# EAGLE board board_schematic (EAGLE 7.7.0)
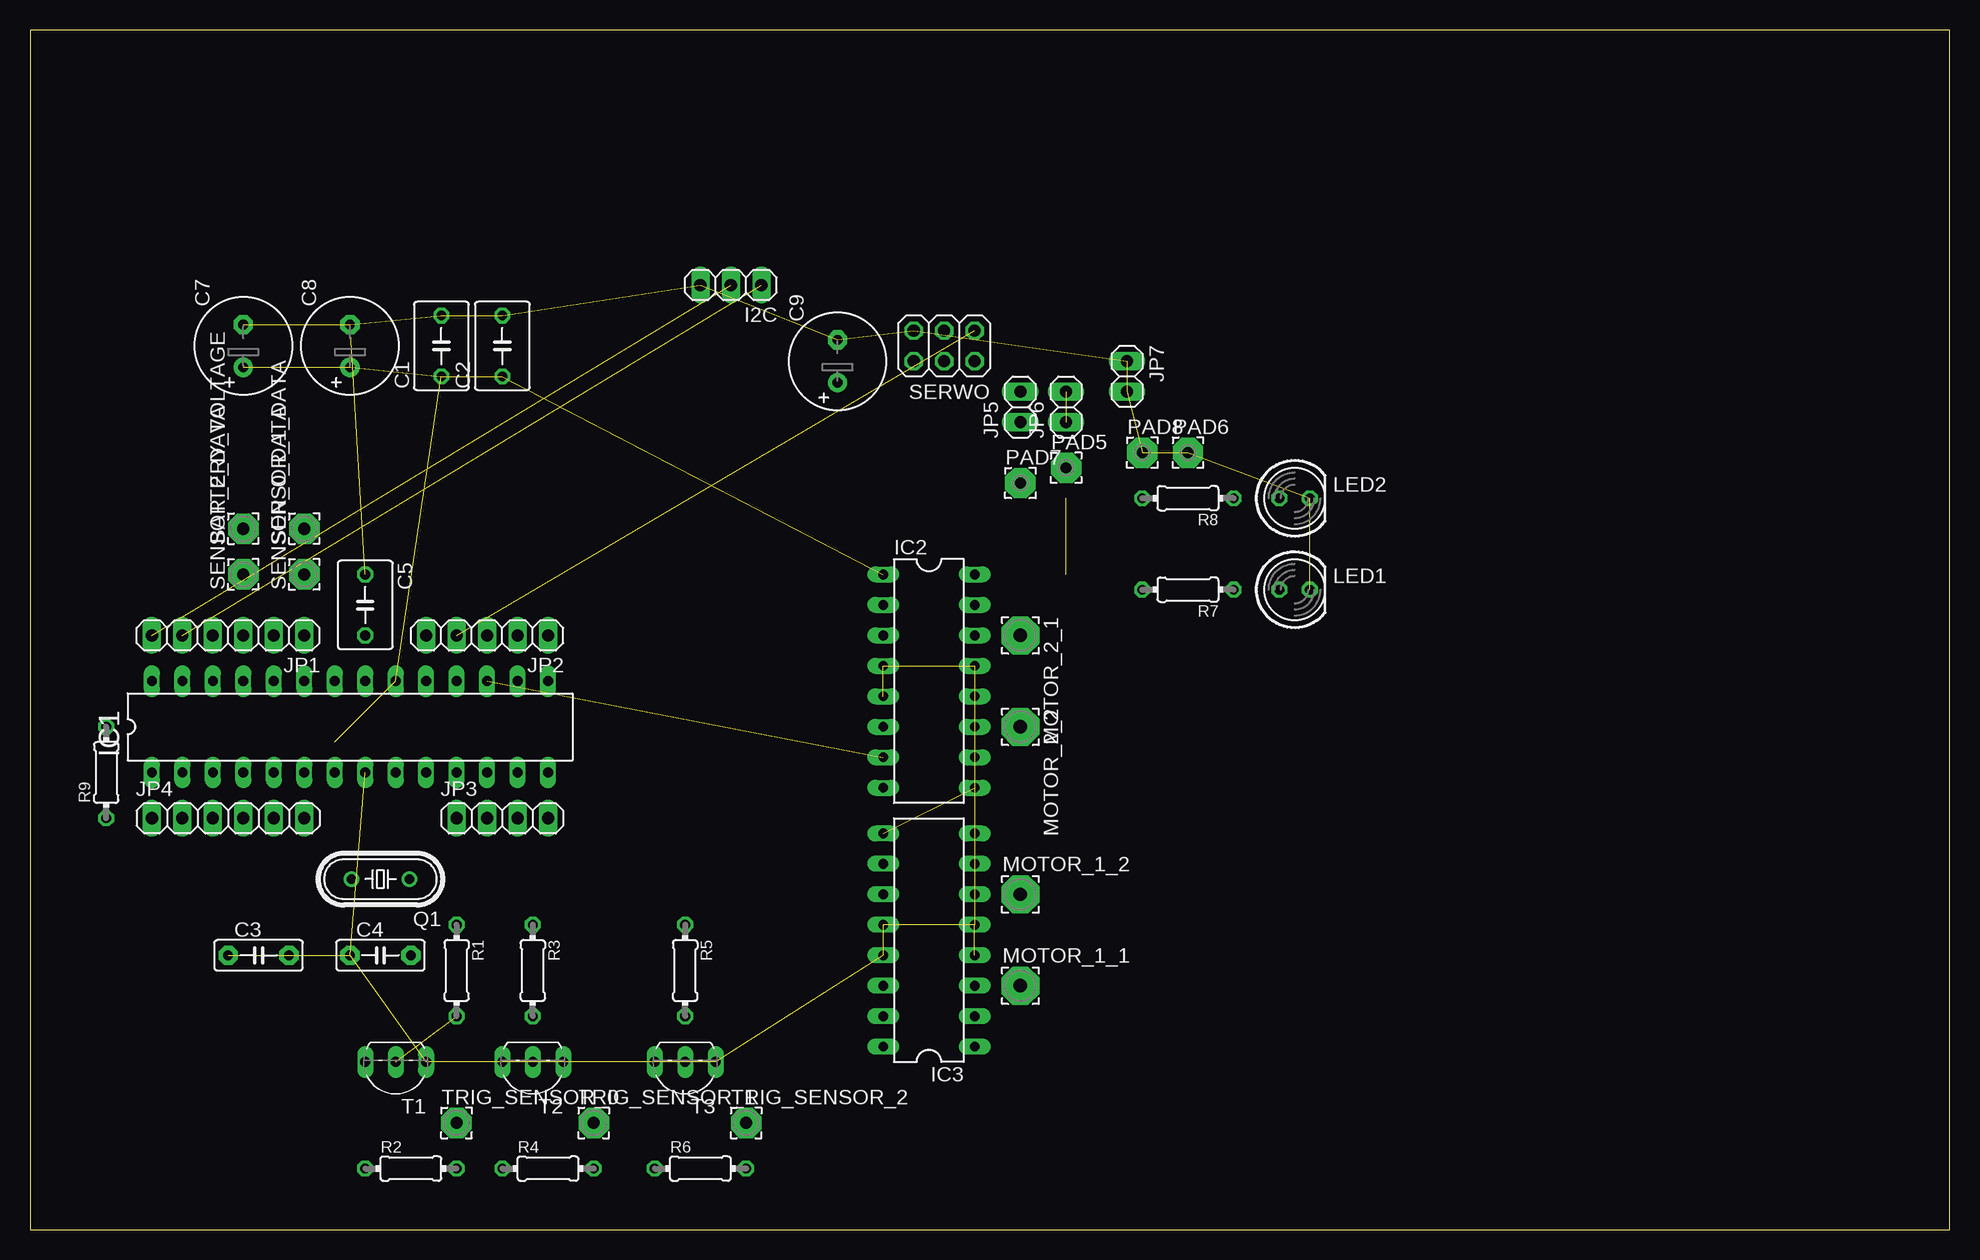
[diagram p0: board, top side]
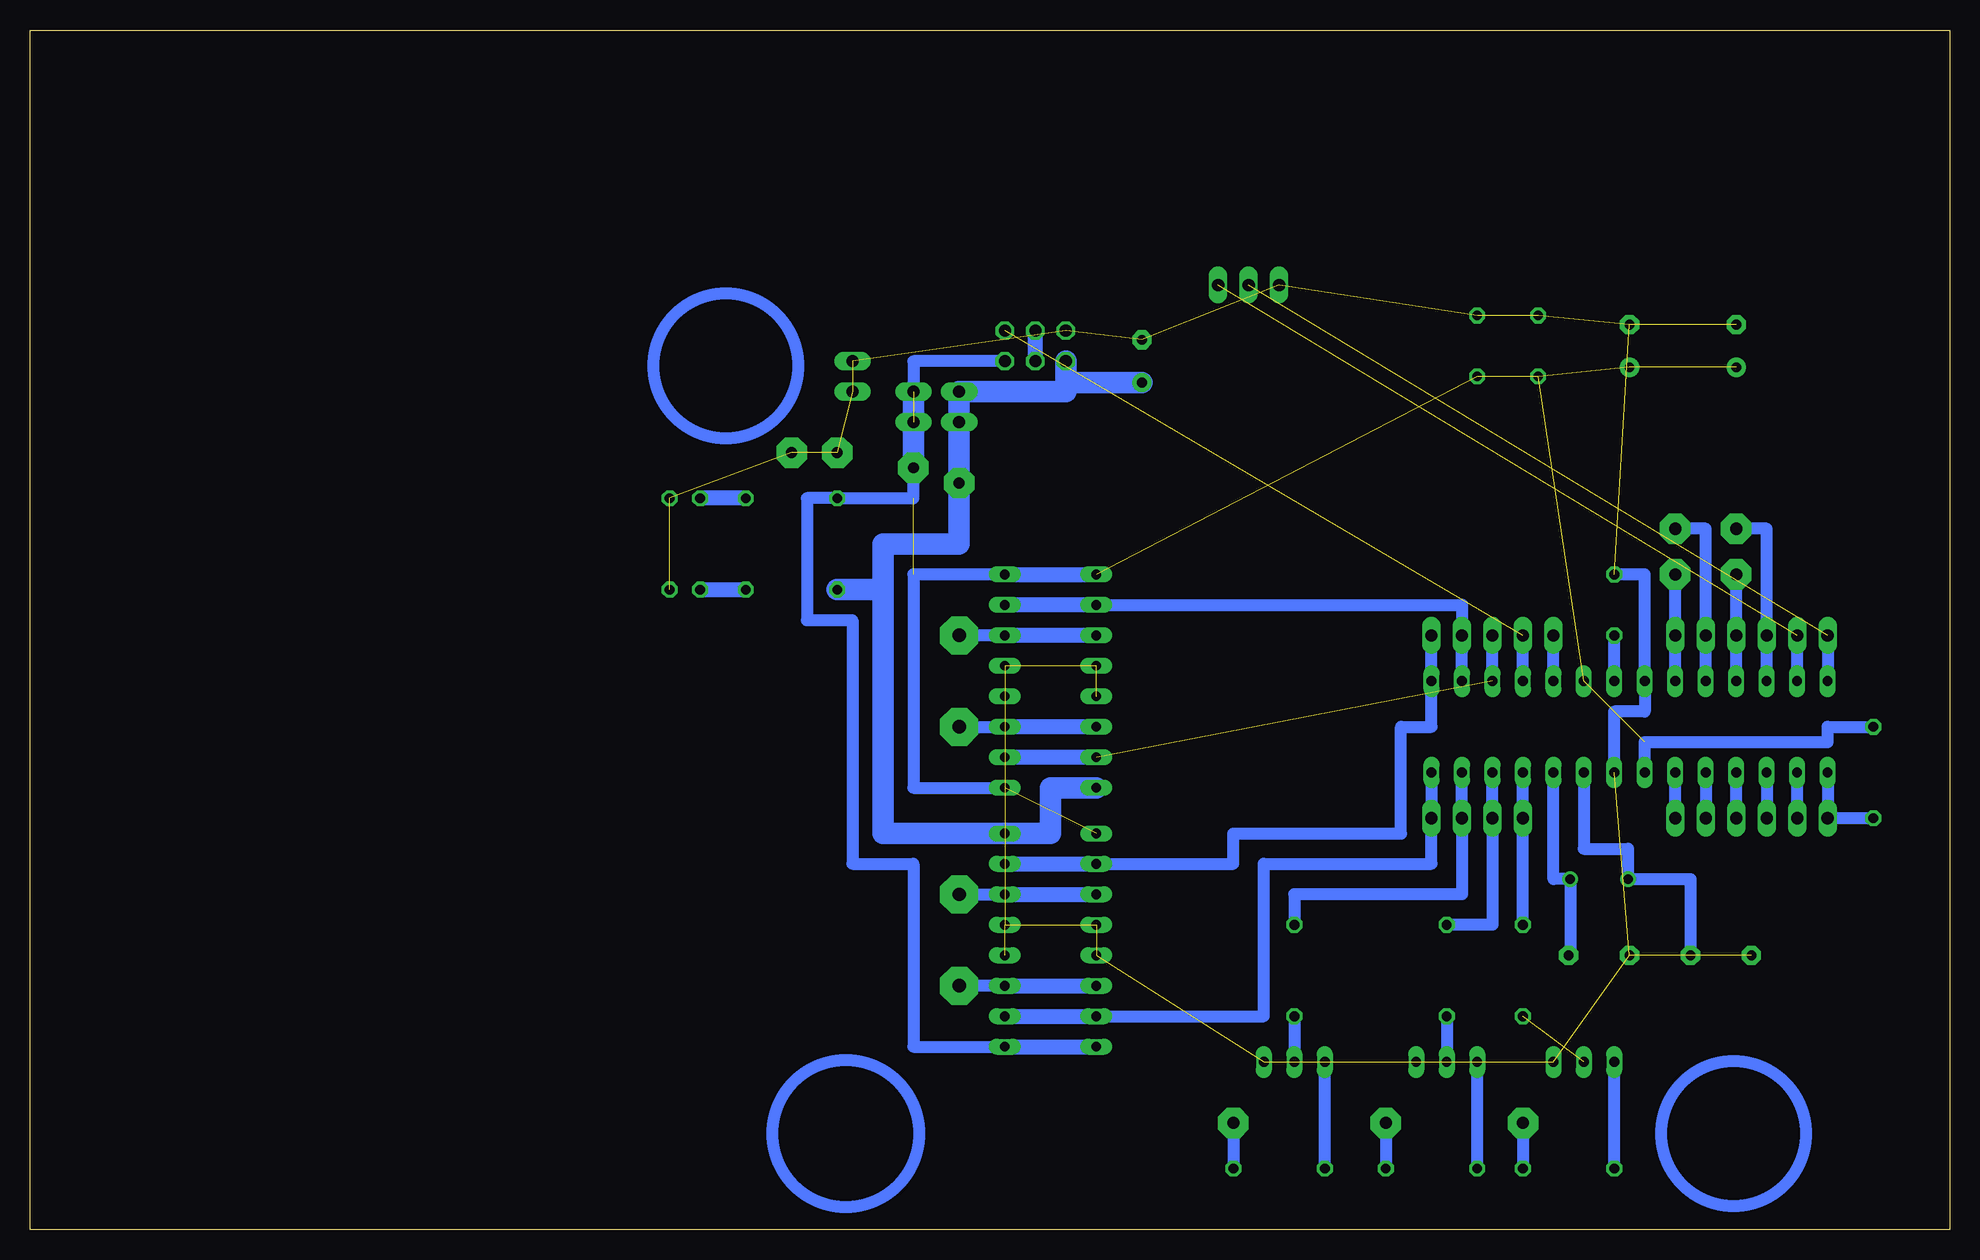
[diagram p1: board, bottom side, seen from below]

Size 160 x 100 mm. Coordinates in mm from the lower left corner, seen from the top.
Outline: 0,0 160,0 160,100 0,100 0,0
Copper layers (1*16): Top 0.035mm / dielectric 1.5mm / Bottom 0.035mm
Design rules "default": minimum track width 10mil, minimum drill 24mil, track to track 8mil, track to pad 8mil, pad to pad 8mil, via to via 8mil, smd to smd 8mil, copper to edge 40mil, drill to drill 8mil, minimum pad ring 10mil, minimum via ring 8mil, stop-mask expansion 4mil, vias tented up to drill 0mil, thermal gap 10mil

## Footprints (pad centres in the part's own frame; a part is rotated, then mirrored left to right if it is on the bottom)
2,54/1,0 = drill 1.016 pad 2.54 octagon: 1 0,0
C050-045X075 = drill 0.813 octagon: 1 -2.54,0; 2 2.54,0
C5B2.5 = drill 0.813 pad 1.6 octagon: 1 -2.54,0; 2 2.54,0
E3,5-8 = drill 0.813 pad 1.6: + -1.778,0 | drill 0.813 pad 1.6 octagon: - 1.778,0
1X03 = drill 1.016 long: 1 -2.54,0; 2 0,0; 3 2.54,0
DIL28-3 = drill 0.813 long: 1 -16.51,-3.81; 2 -13.97,-3.81; 3 -11.43,-3.81; 4 -8.89,-3.81; 5 -6.35,-3.81; 6 -3.81,-3.81; 7 -1.27,-3.81; 8 1.27,-3.81; 9 3.81,-3.81; 10 6.35,-3.81; 11 8.89,-3.81; 12 11.43,-3.81; 13 13.97,-3.81; 14 16.51,-3.81; 15 16.51,3.81; 16 13.97,3.81; 17 11.43,3.81; 18 8.89,3.81; 19 6.35,3.81; 20 3.81,3.81; 21 1.27,3.81; 22 -1.27,3.81; 23 -3.81,3.81; 24 -6.35,3.81; 25 -8.89,3.81; 26 -11.43,3.81; 27 -13.97,3.81; 28 -16.51,3.81
DIL16 = drill 0.813 long: 1 -8.89,-3.81; 2 -6.35,-3.81; 3 -3.81,-3.81; 4 -1.27,-3.81; 5 1.27,-3.81; 6 3.81,-3.81; 7 6.35,-3.81; 8 8.89,-3.81; 9 8.89,3.81; 10 6.35,3.81; 11 3.81,3.81; 12 1.27,3.81; 13 -1.27,3.81; 14 -3.81,3.81; 15 -6.35,3.81; 16 -8.89,3.81
1X06 = drill 1.016 long: 1 -6.35,0; 2 -3.81,0; 3 -1.27,0; 4 1.27,0; 5 3.81,0; 6 6.35,0
1X05 = drill 1.016 long: 1 -5.08,0; 2 -2.54,0; 3 0,0; 4 2.54,0; 5 5.08,0
1X04 = drill 1.016 long: 1 -3.81,0; 2 -1.27,0; 3 1.27,0; 4 3.81,0
1X02 = drill 1.016 long: 1 -1.27,0; 2 1.27,0
LED5MM = drill 0.813 octagon: A -1.27,0; K 1.27,0
3,17/1,1 = drill 1.118 pad 3.175 octagon: 1 0,0
2,54/0,9 = drill 0.914 pad 2.54 octagon: 1 0,0
HC49/S = drill 0.813: 1 -2.413,0; 2 2.413,0
0204/7 = drill 0.813 octagon: 1 -3.81,0; 2 3.81,0
2X03 = drill 1.016 octagon: 1 -2.54,-1.27; 2 -2.54,1.27; 3 0,-1.27; 4 0,1.27; 5 2.54,-1.27; 6 2.54,1.27
TO92-EBC = drill 0.813 long: B 0,-1.27; C 2.54,-1.27; E -2.54,-1.27

## Placement (x,y rotation side)
BATTERY_VOLTAGE  WIREPAD2,54/1,0  [2,54/1,0]  17.78,58.42 90 top
C1  100uF  [C050-045X075]  34.29,73.66 90 top
C2  100nF  [C050-045X075]  39.37,73.66 90 top
C3  15pF  [C5B2.5]  19.05,22.86 0 top
C4  15pF  [C5B2.5]  29.21,22.86 0 top
C5  100nF  [C050-045X075]  27.94,52.07 270 top
C7  470uF  [E3,5-8]  17.78,73.66 90 top
C8  470uF  [E3,5-8]  26.67,73.66 90 top
C9  470uF  [E3,5-8]  67.31,72.39 90 top
I2C  [1X03]  58.42,78.74 180 top
IC1  MEGA8-P  [DIL28-3]  26.67,41.91 0 top
IC2  L293D  [DIL16]  74.93,45.72 270 top
IC3  L293D  [DIL16]  74.93,24.13 90 top
JP1  [1X06]  16.51,49.53 180 top
JP2  [1X05]  38.1,49.53 180 top
JP3  [1X04]  39.37,34.29 0 top
JP4  [1X06]  16.51,34.29 0 top
JP5  [1X02]  82.55,68.58 90 top
JP6  [1X02]  86.36,68.58 90 top
JP7  [1X02]  91.44,71.12 270 top
LED1  [LED5MM]  105.41,53.34 0 top
LED2  [LED5MM]  105.41,60.96 0 top
MOTOR_1_1  WIREPAD3,17/1,1  [3,17/1,1]  82.55,20.32 0 top
MOTOR_1_2  WIREPAD3,17/1,1  [3,17/1,1]  82.55,27.94 0 top
MOTOR_2_1  WIREPAD3,17/1,1  [3,17/1,1]  82.55,49.53 270 top
MOTOR_2_2  WIREPAD3,17/1,1  [3,17/1,1]  82.55,41.91 270 top
PAD5  WIREPAD2,54/0,9  [2,54/0,9]  86.36,63.5 0 top
PAD6  WIREPAD2,54/0,9  [2,54/0,9]  96.52,64.77 0 top
PAD7  WIREPAD2,54/0,9  [2,54/0,9]  82.55,62.23 0 top
PAD8  WIREPAD2,54/0,9  [2,54/0,9]  92.71,64.77 0 top
Q1  [HC49/S]  29.21,29.21 180 top
R1  1k  [0204/7]  35.56,21.59 270 top
R2  81  [0204/7]  31.75,5.08 0 top
R3  1k  [0204/7]  41.91,21.59 270 top
R4  81  [0204/7]  43.18,5.08 0 top
R5  1k  [0204/7]  54.61,21.59 270 top
R6  81  [0204/7]  55.88,5.08 0 top
R7  2.2k  [0204/7]  96.52,53.34 180 top
R8  2.7k  [0204/7]  96.52,60.96 180 top
R9  2.7k  [0204/7]  6.35,38.1 90 top
SENSOR_0_DATA  WIREPAD2,54/1,0  [2,54/1,0]  22.86,54.61 90 top
SENSOR_1_DATA  WIREPAD2,54/1,0  [2,54/1,0]  22.86,58.42 90 top
SENSOR_2_DATA  WIREPAD2,54/1,0  [2,54/1,0]  17.78,54.61 90 top
SERWO  [2X03]  76.2,73.66 180 top
T1  [TO92-EBC]  30.48,12.7 180 top
T2  [TO92-EBC]  41.91,12.7 180 top
T3  [TO92-EBC]  54.61,12.7 180 top
TRIG_SENSOR_0  WIREPAD2,54/1,0  [2,54/1,0]  35.56,8.89 0 top
TRIG_SENSOR_1  WIREPAD2,54/1,0  [2,54/1,0]  46.99,8.89 0 top
TRIG_SENSOR_2  WIREPAD2,54/1,0  [2,54/1,0]  59.69,8.89 0 top

## Library data of the parts
BATTERY_VOLTAGE MOTOR_1_1 MOTOR_1_2 MOTOR_2_1 MOTOR_2_2 PAD5-PAD8 SENSOR_0_DATA SENSOR_1_DATA SENSOR_2_DATA TRIG_SENSOR_0 TRIG_SENSOR_1 TRIG_SENSOR_2 = wirepad
C1 C2 C5 = rcl
C3 C4 = capacitor-wima
C7-C9 = resistor
I2C JP1-JP7 SERWO = pinhead
IC1 = atmel; OC_FARNELL: unknown; OC_NEWARK: unknown
IC2 IC3 = st-microelectronics; MPN: L293D; OC_FARNELL: 9589619; OC_NEWARK: 56P8249
LED1 LED2 = led
Q1 = crystal; OC_FARNELL: 1667008; OC_NEWARK: unknown
R1-R9 = eagle-ltspice; SPICEMODEL: NONE; SPICEPREFIX: R
T1-T3 = transistor-neu-to92

## Nets
BLABLA: I2C.1 IC1.27 JP1.5
GND: C1.2 C2.2 C3.1 C4.1 C5.1 C7.- C8.- C9.- I2C.3 IC1.8 IC1.22 IC2.4 IC2.5 IC2.12 IC2.13 IC3.4 IC3.5 IC3.12 IC3.13 JP7.1 JP7.2 LED1.K LED2.K PAD6.1 PAD8.1 SERWO.5 T1.E T2.E T3.E
LOGIC_VCC: C1.1 C2.1 C7.+ C8.+ IC1.7 IC1.20 IC2.1 IC2.9 IC2.16 IC3.1 IC3.9 IC3.16 JP6.1 JP6.2 PAD5.1 R8.2 R9.2 SERWO.2
N$1: IC3.3 IC3.14 MOTOR_1_1.1
N$2: IC1.15 IC3.7 IC3.10 JP2.1
N$3: IC2.3 IC2.14 MOTOR_2_1.1
N$4: IC1.16 IC2.2 IC2.15 JP2.2
N$5: R1.2 T1.B
N$6: IC2.6 IC2.11 MOTOR_2_2.1
N$7: IC3.6 IC3.11 MOTOR_1_2.1
N$8: IC1.17 IC2.7 IC2.10 JP2.3
N$9: IC1.23 JP1.1 SENSOR_0_DATA.1
N$10: C3.2 IC1.9 Q1.2
N$11: C4.2 IC1.10 Q1.1
N$12: C5.2 IC1.21
N$13: IC1.24 JP1.2 SENSOR_1_DATA.1
N$14: IC1.25 JP1.3 SENSOR_2_DATA.1
N$15: BATTERY_VOLTAGE.1 IC1.26 JP1.4
N$17: I2C.2 IC1.28 JP1.6
N$18: LED1.A R7.1
N$19: IC1.19 JP2.5
N$20: IC1.6 JP4.6
N$21: IC1.5 JP4.5
N$22: IC1.4 JP4.4
N$23: IC1.3 JP4.3
N$24: IC1.2 JP4.2
N$25: SERWO.3 SERWO.4
N$26: LED2.A R8.1
N$28: IC1.14 IC3.2 IC3.15 JP3.4
N$29: R2.1 T1.C
N$30: R2.2 TRIG_SENSOR_0.1
N$32: R3.2 T2.B
N$33: R4.1 T2.C
N$34: R4.2 TRIG_SENSOR_1.1
N$36: R5.2 T3.B
N$37: R6.1 T3.C
N$38: R6.2 TRIG_SENSOR_2.1
PB4: IC1.18 JP2.4 SERWO.1
PD5: IC1.11 JP3.1 R1.1
PD6: IC1.12 JP3.2 R3.1
PD7: IC1.13 JP3.3 R5.1
RESET: IC1.1 JP4.1 R9.1
VCC: C9.+ IC2.8 IC3.8 JP5.1 JP5.2 PAD7.1 R7.2 SERWO.6

## Tracks (layer width: path | path; a pad name or v marks a point on that pad's centre or on a via)
BLABLA  (1 unrouted)
  Bottom 1.016: IC1.27 JP1.5
GND  (26 unrouted)
  Bottom 1.016: IC1.8 27.94,43.18 25.4,43.18 IC1.22 25.4,54.61 C5.1
LOGIC_VCC  (9 unrouted)
  Bottom 1.016: PAD5.1 86.36,60.96 R8.2 95.25,60.96 95.25,50.8 91.44,50.8 91.44,30.48 86.36,30.48 86.36,15.24 IC3.1 | SERWO.2 86.36,72.39 JP6.2 | IC2.16 86.36,54.61 86.36,36.83 IC2.9 | IC1.7 25.4,40.64 10.16,40.64 10.16,41.91 R9.2
  Bottom 1.27: IC2.16 IC2.1 | IC3.1 IC3.16
  Bottom 1.778: JP6.2 PAD5.1
N$1
  Bottom 1.016: IC3.3 MOTOR_1_1.1
  Bottom 1.27: IC3.3 IC3.14
N$2
  Bottom 1.016: JP2.1 IC1.15 43.18,41.91 45.72,41.91 45.72,33.02 59.69,33.02 59.69,30.48 IC3.10
  Bottom 1.27: IC3.7 IC3.10
N$3
  Bottom 1.016: IC2.14 MOTOR_2_1.1
  Bottom 1.27: IC2.3 IC2.14
N$4
  Bottom 1.016: IC1.16 40.64,48.26 JP2.2 40.64,52.07 IC2.2
  Bottom 1.27: IC2.2 IC2.15
N$5  (1 unrouted)
N$6
  Bottom 1.016: MOTOR_2_2.1 IC2.11
  Bottom 1.27: IC2.6 IC2.11
N$7
  Bottom 1.016: MOTOR_1_2.1 IC3.6
  Bottom 1.27: IC3.6 IC3.11
N$8  (1 unrouted)
  Bottom 1.016: IC1.17 JP2.3
  Bottom 1.27: IC2.7 IC2.10
N$9
  Bottom 1.016: IC1.23 JP1.1 SENSOR_0_DATA.1
N$10
  Bottom 1.016: IC1.9 30.48,31.75 26.8,31.75 Q1.2 21.59,29.21 C3.2
N$11
  Bottom 1.016: C4.2 31.62,22.86 Q1.1 33.02,29.21 IC1.10
N$12
  Bottom 1.016: IC1.21 C5.2
N$13
  Bottom 1.016: IC1.24 JP1.2 20.32,58.42 SENSOR_1_DATA.1
N$14
  Bottom 1.016: IC1.25 JP1.3 SENSOR_2_DATA.1
N$15
  Bottom 1.016: IC1.26 JP1.4 15.24,58.42 BATTERY_VOLTAGE.1
N$17  (1 unrouted)
  Bottom 1.016: JP1.6 IC1.28
N$18
  Bottom 1.27: LED1.A R7.1
N$19
  Bottom 1.016: IC1.19 JP2.5
N$20
  Bottom 1.016: JP4.6 IC1.6
N$21
  Bottom 1.016: IC1.5 JP4.5
N$22
  Bottom 1.016: JP4.4 IC1.4
N$23
  Bottom 1.016: IC1.3 JP4.3
N$24
  Bottom 1.016: JP4.2 IC1.2
N$25
  Bottom 1.27: SERWO.4 SERWO.3
N$26
  Bottom 1.27: R8.1 LED2.A
N$28
  Bottom 1.016: IC1.14 JP3.4 43.18,30.48 57.15,30.48 57.15,17.78 IC3.15
  Bottom 1.27: IC3.2 IC3.15
N$29
  Bottom 1.016: R2.1 T1.C
N$30
  Bottom 1.016: TRIG_SENSOR_0.1 R2.2
N$32
  Bottom 1.016: R3.2 T2.B
N$33
  Bottom 1.016: R4.1 T2.C
N$34
  Bottom 1.016: TRIG_SENSOR_1.1 R4.2
N$36
  Bottom 1.016: R5.2 T3.B
N$37
  Bottom 1.016: R6.1 T3.C
N$38
  Bottom 1.016: TRIG_SENSOR_2.1 R6.2
PB4  (1 unrouted)
  Bottom 1.016: IC1.18 JP2.4
PD5
  Bottom 1.016: IC1.11 JP3.1 R1.1
PD6
  Bottom 1.016: IC1.12 JP3.2 38.1,25.4 R3.1
PD7
  Bottom 1.016: IC1.13 JP3.3 40.64,27.94 54.61,27.94 R5.1
RESET
  Bottom 1.016: IC1.1 JP4.1 R9.1
VCC
  Bottom 1.778: PAD7.1 JP5.1 JP5.2 73.66,69.85 73.66,70.61 | SERWO.6 73.66,70.61 | PAD7.1 82.55,60.96 | IC2.8 74.93,36.83 74.93,33.02 IC3.8 88.9,33.02 88.9,53.34 | R7.2 88.9,53.34 | 88.9,53.34 88.9,57.15 82.55,57.15 PAD7.1 | C9.+ 73.66,70.61
(copper drawn outside any net)
  shapes: Bottom circle x3